# EAGLE board lights_node (EAGLE 6.5.0)
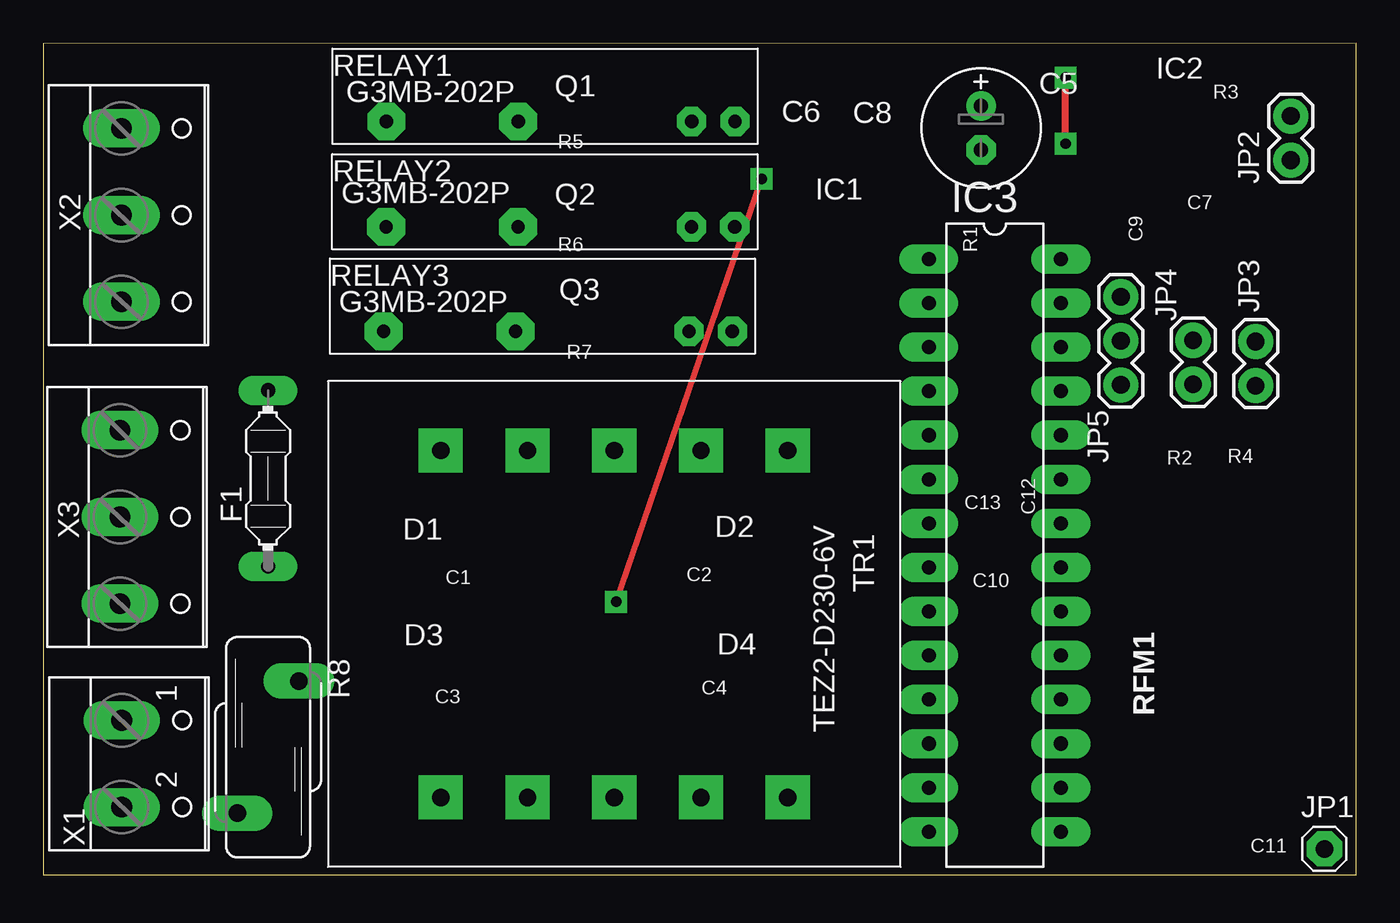
[diagram p0: board, top side]
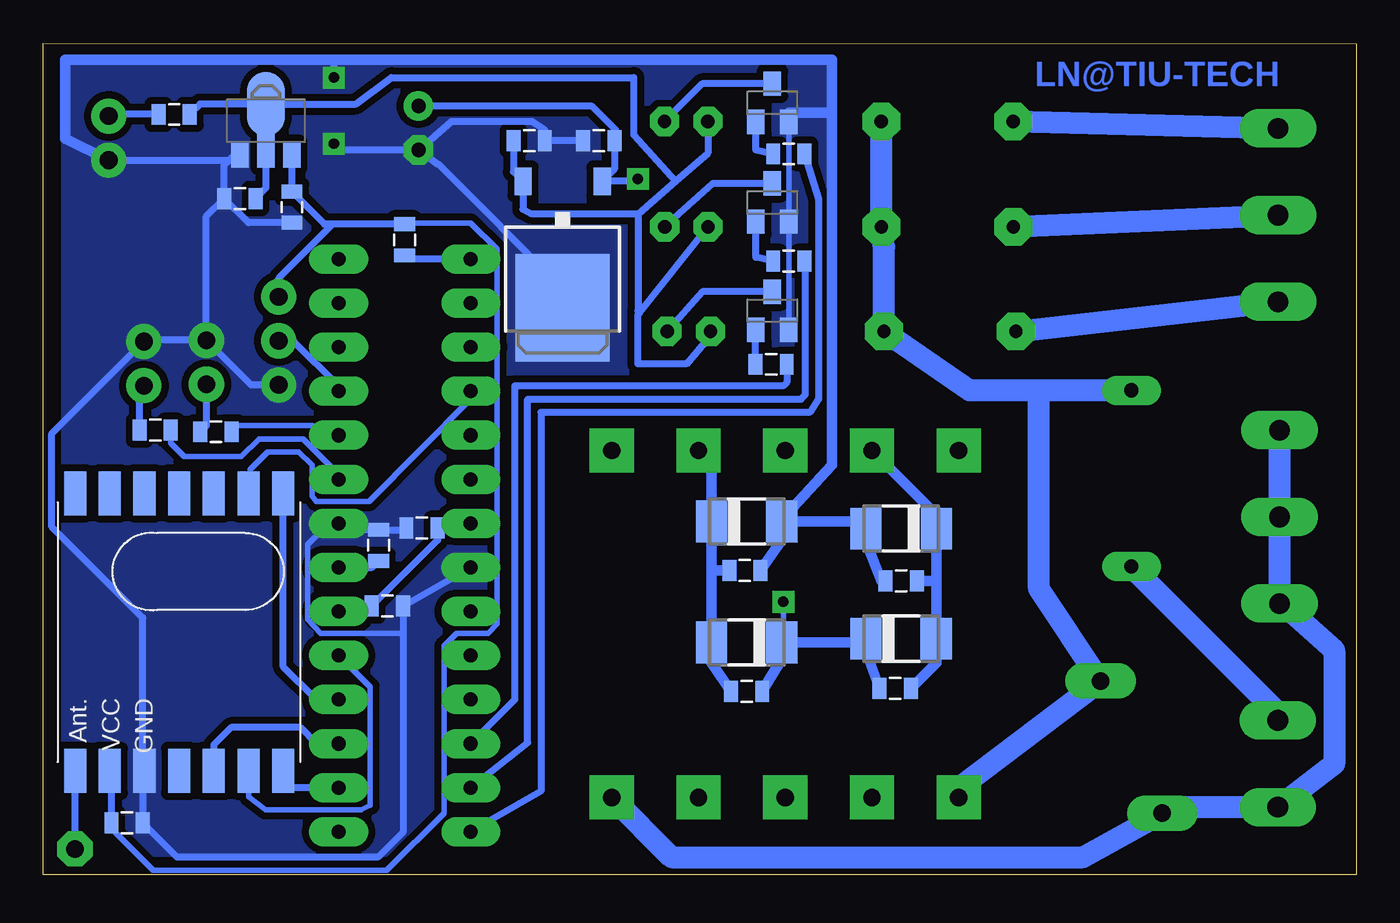
[diagram p1: board, bottom side, seen from below]

Size 75.68 x 47.95 mm. Coordinates in mm from the lower left corner, seen from the top.
Outline: 0,0 75.68,0.02 75.68,47.95 0,47.92 0,0
Copper layers (1*16): Top 0.035mm / dielectric 1.5mm / Bottom 0.035mm
Design rules "default *": minimum track width 10mil, minimum drill 24mil, track to track 8mil, track to pad 8mil, pad to pad 8mil, via to via 8mil, smd to smd 8mil, copper to edge 40mil, drill to drill 8mil, minimum pad ring 10mil, minimum via ring 8mil, stop-mask expansion 4mil, vias tented up to drill 0mil, thermal gap 10mil

## Footprints (pad centres in the part's own frame; a part is rotated, then mirrored left to right if it is on the bottom)
0805 = smd 0.8 x 1.2: 1 -0.9,0; 2 0.9,0
E2,5-7 = drill 0.813 pad 1.6: + -1.27,0 | drill 0.813 pad 1.6 octagon: - 1.27,0
DO-214AC = smd 1.8 x 2.4: A 2.025,0; C -2.025,0
PICOFUSE = drill 0.813 long: 1 -5.08,0; 2 5.08,0
TO252 = smd 1 x 1.6: 1 -2.28,-4.8; 2 2.28,-4.8 | smd 5.4 x 6.2: 3 0,2.5
MCP1703-SOT89 = smd 1 x 1.5: GND -1.499,-1.981; VOUT 1.499,-1.981 | smd 2.2 x 3.7: VIN1 0,0.94 | smd 1 x 2: VIN2 0,-1.727
DIL28-3 = drill 0.813 long: 1 -16.51,-3.81; 2 -13.97,-3.81; 3 -11.43,-3.81; 4 -8.89,-3.81; 5 -6.35,-3.81; 6 -3.81,-3.81; 7 -1.27,-3.81; 8 1.27,-3.81; 9 3.81,-3.81; 10 6.35,-3.81; 11 8.89,-3.81; 12 11.43,-3.81; 13 13.97,-3.81; 14 16.51,-3.81; 15 16.51,3.81; 16 13.97,3.81; 17 11.43,3.81; 18 8.89,3.81; 19 6.35,3.81; 20 3.81,3.81; 21 1.27,3.81; 22 -1.27,3.81; 23 -3.81,3.81; 24 -6.35,3.81; 25 -8.89,3.81; 26 -11.43,3.81; 27 -13.97,3.81; 28 -16.51,3.81
1X01 = drill 1.016 octagon: 1 0,0
1X02 = drill 1.016 pad 1.88: 1 0,0; 2 2.54,0
1X03 = drill 1.016 pad 1.88: 1 0,0; 2 2.54,0; 3 5.08,0
SOT23-BEC = smd 1 x 1.4: B -0.95,-1.1; C 0,1.1; E 0.95,-1.1
S10K300 = drill 1.016 long: 1 -1.778,-3.81; 2 1.778,3.81
G3MB-202P = drill 0.762 pad 1.676 octagon: IN+ -7.63,1.66; IN- -10.13,1.66 | drill 0.762 pad 2.184 octagon: K1 2.37,1.66; K2 9.97,1.66
RFM12B = smd 2.54 x 1.27: ANT 8,-6; FFS -8,2; GND 8,-2; IRQ -8,4; P$8 -8,0; P$9 -8,-2; P$10 -8,-4; P$12 -8,-6; P$16 8,0; SCK 8,4; SDI 8,2; SDO -8,6; SEL 8,6; VDD 8,-4
TEZ1.5-PKG = drill 1 pad 2.54 square: P1 -10.5,10; P2 -5.5,10; P3 -0.5,10; P4 4.5,10; P5 9.5,10; S6 9.5,-10; S7 4.5,-10; S8 -0.5,-10; S9 -5.5,-10; S10 -10.5,-10
W237-102 = drill 1.194 long: 1 -2.5,-1.27; 2 2.5,-1.27
W237-103 = drill 1.194 long: 1 -5,-1.29; 2 0,-1.29; 3 5,-1.29

## Placement (x,y rotation side)
C1  0.1u/63V  [0805]  26.23,16.95 0 bottom
C2  0.1u/63V  [0805]  35.24,17.55 180 bottom
C3  0.1u/63V  [0805]  26.58,10.76 180 bottom
C4  0.1u/63V  [0805]  35.14,10.58 0 bottom
C5  470u/16V  [E2,5-7]  54.05,43.07 270 top
C6  1u  [0805]  43.66,42.34 180 bottom
C7  1u  [0805]  64.35,39 180 bottom
C8  1u  [0805]  47.67,42.34 0 bottom
C9  1u  [0805]  61.35,38.5 270 bottom
C10  0.1u  [0805]  55.85,15.5 0 bottom
C11  1u  [0805]  70.85,3 0 bottom
C12  0.1u  [0805]  56.35,19 90 bottom
C13  0.1u  [0805]  53.85,20 0 bottom
D1  M7  [DO-214AC]  26.23,19.97 180 bottom
D2  M7  [DO-214AC]  35.14,20.37 0 bottom
D3  M7  [DO-214AC]  26.23,13.62 0 bottom
D4  M7  [DO-214AC]  35.14,13.41 180 bottom
F1  240Vac/3.15A  [PICOFUSE]  12.95,22.86 90 top
IC1  7805DT  [TO252]  45.74,35.19 180 bottom
IC2  MCP1703-3V3  [MCP1703-SOT89]  62.85,43.5 0 bottom
IC3  ATMEGA48/88/168-PU  [DIL28-3]  54.85,19 270 top
JP1  ANT  [1X01]  73.85,1.5 0 top
JP2  M02PTH  [1X02]  71.91,41.21 90 top
JP3  M02PTH  [1X02]  69.89,28.21 90 top
JP4  M02PTH  [1X02]  66.28,30.83 270 top
JP5  IR SENSOR  [1X03]  62.11,33.33 270 top
Q1  BC846  [SOT23-BEC]  33.65,44.52 0 bottom
Q2  BC846  [SOT23-BEC]  33.65,38.77 0 bottom
Q3  BC846  [SOT23-BEC]  33.65,32.52 0 bottom
R1  10K  [0805]  54.86,36.62 270 bottom
R2  270  [0805]  65.73,25.55 180 bottom
R3  470  [0805]  68.14,43.85 180 bottom
R4  270  [0805]  69.23,25.64 180 bottom
R5  36K  [0805]  32.71,41.57 0 bottom
R6  36K  [0805]  32.71,35.38 0 bottom
R7  36K  [0805]  33.72,29.44 0 bottom
R8  S10K300  [S10K300]  12.95,7.37 180 top
RELAY1  G3MB-202P  [G3MB-202P]  29.74,45.11 180 top
RELAY2  G3MB-202P  [G3MB-202P]  29.73,39.03 180 top
RELAY3  G3MB-202P  [G3MB-202P]  29.59,33 180 top
RFM1  RFM12B  [RFM12B]  67.85,14 270 bottom
TR1  TEZ2-D230-6V  [TEZ1.5-PKG]  32.41,14.47 180 top
X1  230Vac  [W237-102]  5.79,6.41 270 top
X2  L-H  [W237-103]  5.79,38.05 270 top
X3  L-N  [W237-103]  5.71,20.64 270 top

## Library data of the parts
C1-C4 C6-C13 R1-R4 = SparkFun-Passives
C5 = resistor
D1-D4 = diode
F1 = fuse; OC_FARNELL: unknown; OC_NEWARK: unknown
IC1 = linear
IC2 = MCP1703_SOT89
IC3 = atmega48_88_168
JP1 = pinhead
JP2-JP5 = SparkFun-Connectors
Q1-Q3 = transistor
R5-R7 = SparkFun-Resistors
R8 = varistor
RELAY1-RELAY3 = g3mb
RFM1 = JeeParts
TR1 = breve-tufvassons-transf
X1 = con-wago-500; MPN: 237-102; OC_FARNELL: unknown; OC_NEWARK: 70K9898
X2 X3 = con-wago-500; MPN: 237-103; OC_FARNELL: unknown; OC_NEWARK: 18M7116

## Nets
+3V3: C9.1 C10.1 C11.1 C13.2 IC2.VOUT IC3.7 IC3.20 JP5.1 R1.1 RFM1.VDD
+5V: C7.1 C8.1 IC1.2 IC2.VIN1 IC2.VIN2 R3.1 RELAY1.IN+ RELAY2.IN+ RELAY3.IN+
AGND: R8.2 TR1.P1 X1.2 X3.1 X3.2 X3.3
GND: C1.1 C2.1 C5.- C6.2 C7.2 C8.2 C9.2 C10.2 C11.2 C12.2 C13.1 D1.A D2.A IC1.3 IC2.GND IC3.8 IC3.22 JP2.1 JP3.2 JP4.1 JP5.3 Q1.E Q2.E Q3.E RFM1.GND
IR_DATA: IC3.25 JP5.2
IR_LED: IC3.24 R2.1
IRQ: IC3.4 RFM1.IRQ
MISO: IC3.18 RFM1.SDO
MOSI: IC3.17 RFM1.SDI
N$1: F1.2 R8.1 RELAY1.K1 RELAY2.K1 RELAY3.K1 TR1.P5
N$2: RELAY1.K2 X2.1
N$3: RELAY2.K2 X2.2
N$4: RELAY3.K2 X2.3
N$5: Q1.C RELAY1.IN-
N$6: Q1.B R5.1
N$7: Q2.C RELAY2.IN-
N$8: JP2.2 R3.2
N$9: JP4.2 R2.2
N$10: C1.2 C3.1 D1.C D3.A TR1.S7
N$11: C2.2 C4.1 D2.C D4.A TR1.S9
N$12: JP3.1 R4.2
N$13: Q2.B R6.1
N$14: Q3.B R7.1
N$15: C12.1 IC3.21
N$16: JP1.1 RFM1.ANT
N$17: Q3.C RELAY3.IN-
N$18: F1.1 X1.1
RELAY1_CMD: IC3.14 R5.2
RELAY2_CMD: IC3.13 R6.2
RELAY3_CMD: IC3.12 R7.2
RESET: IC3.1 R1.2
RF_LED: IC3.23 R4.1
SCK: IC3.19 RFM1.SCK
SS: IC3.16 RFM1.SEL
VRAW: C3.2 C4.2 C5.+ C6.1 D3.C D4.C IC1.1

## Tracks (layer width: path | path; a pad name or v marks a point on that pad's centre or on a via)
+3V3
  Bottom 0.305: 49.53,20.26 49.53,36.07 51.05,37.59 54.79,37.59 R1.1 | 49.53,20.26 IC3.7 | C11.1 71.75,2.66 69.34,0.25 55.88,0.25 52.58,3.56 52.58,13.21 51.87,13.92 50.04,13.92 49.53,14.48 49.53,20.26
  Bottom 0.406: IC3.20 58.35,15.5 C10.1 52.95,19.3 C13.2 52.68,20.27 IC3.7 50.85,20.27 | C11.1 71.75,5.9 RFM1.VDD | C9.1 IC2.VOUT | 61.32,39.37 C9.1 | JP5.1 62.11,34.41 59,37.52 | R1.1 59,37.52 | 59,37.52 59.47,37.52 C9.1
+5V
  Bottom 0.406: C8.1 48.57,40.54 IC1.2 48.02,38.37 47.5,38.1 41.4,38.1 | IC2.VIN1 57.67,44.44 55.63,45.97 41.66,45.97 41.66,42.67 39.23,40 | IC2.VIN1 IC2.VIN2 62.85,39.6 C7.1 | IC2.VIN1 66.64,44.44 R3.1 | 41.3,32.41 41.4,32.31 41.4,29.46 38.61,29.46 37.22,31.11 RELAY3.IN+ | 41.3,32.41 RELAY2.IN+ | RELAY1.IN+ 37.37,41.62 39.23,40 | 41.4,38.1 41.4,32.51 41.3,32.41 | 39.23,40 41.4,38.1
AGND
  Bottom 1.27: X3.1 X3.2 X3.3 3.7,15.13 1.27,12.95 1.27,6.4 X1.2 10.77,3.91 R8.2 15.75,1.02 39.46,1.02 TR1.P1
GND  (via drill 0.6)
  Top 0.406: v58.93,42.16 v58.93,45.97
  Bottom 0.305: IC3.22 59.23,20.27 60.45,19.05 60.45,14.73 59.69,13.92 54.95,13.92 | Q3.E Q2.E Q1.E
  Bottom 0.406: IC3.22 58.29,19.9 C12.2 54.85,19.9 C13.1 54.95,19.8 | 69.95,5.9 RFM1.GND | JP5.3 63.7,28.25 JP4.1 | JP4.1 69.81,30.83 JP3.2 75.18,25.46 75.18,20.07 69.95,14.83 69.95,5.9 | C6.2 C8.2 46.77,42.96 47.5,43.43 52.16,43.43 C5.- | C7.2 65.28,39.03 65.28,40.89 64.65,41.52 IC2.GND 64.66,41.21 JP2.1 | C1.1 27.37,16.95 | 69.95,5.9 C11.2 67.97,1.02 56.39,1.02 54.95,2.45 54.95,13.92 C10.2 IC3.8 | D2.A 33.12,20.48 | C9.2 63.85,37.6 C7.2 | JP4.1 66.28,37.97 C7.2 | IC1.3 45.72,32.72 45.72,33.78 52.94,41 53,41 C5.- | C5.- 58.82,41.8 v58.93,42.16 | v58.93,45.97 58.93,46.99
  Bottom 0.61: 27.37,16.95 28.19,19.05 28.19,19.91 | C2.1 33.12,19.28 D2.A 28.66,20.38 | JP2.1 74.42,42.45 74.42,46.99 58.93,46.99 30.23,46.99 30.23,43.94 | 33.12,20.48 30.23,23.62 30.23,43.94 | Q1.E 32.68,43.94 30.23,43.94
  Bottom 0.813: 28.19,19.91 D1.A 28.66,20.38
  pour Bottom (isolate 0.406, no thermals): 46.99,0 75.69,0 75.69,47.75 46.99,47.75
  pour Bottom (isolate 0.406, no thermals): 30.23,47.75 30.23,27.94 75.69,27.69 75.95,47.5
IR_DATA
  Bottom 0.406: IC3.25 58.66,28.18 61.21,30.73 62.06,30.73 JP5.2
IR_LED
  Bottom 0.305: IC3.24 58.88,25.35 60.2,25.91 64.72,25.91 R2.1
IRQ
  Bottom 0.305: IC3.4 51.04,27.45 56.9,21.54 59.94,21.54 60.2,21.84 60.2,23.62 60.96,24.38 62.74,24.38 63.75,23.37 63.75,22.1
  Bottom 0.406: 63.75,22.1 RFM1.IRQ
MISO
  Bottom 0.406: IC3.18 59.96,10.11 61.85,12 RFM1.SDO
MOSI
  Bottom 0.406: IC3.17 59.92,7.57 60.85,8.5 64.85,8.5 65.85,7.5 RFM1.SDI
N$1
  Bottom 1.27: RELAY1.K1 27.36,42.67 RELAY2.K1 27.22,36.21 RELAY3.K1 22.29,27.94 18.54,27.94 | TR1.P5 22.91,5.03 R8.1 18.29,16.51 18.29,27.69 18.54,27.94 | F1.2 18.54,27.94
N$2
  Bottom 1.27: RELAY1.K2 X2.1
N$3
  Bottom 1.27: RELAY2.K2 X2.2
N$4
  Bottom 1.27: RELAY3.K2 X2.3
N$5
  Bottom 0.406: RELAY1.IN- 37.7,45.62 Q1.C
N$6
  Bottom 0.406: R5.1 34.6,41.8 Q1.B
N$7
  Bottom 0.406: Q2.C 37.1,39.87 RELAY2.IN-
N$8
  Bottom 0.406: R3.2 71.81,43.85 JP2.2
N$9
  Bottom 0.406: JP4.2 66.28,25.9 R2.2
N$10
  Bottom 0.61: C3.1 24.21,12.23 D3.A 24.21,17.02 | 24.2,20.76 TR1.S7 | 24.21,17.02 D1.C | C1.2 24.27,16.95 24.21,17.02
  Bottom 0.813: D1.C 24.2,20.76
N$11
  Bottom 0.406: 37.34,20.2 D2.C
  Bottom 0.61: C4.1 37.16,12.22 D4.A 37.16,17.53 | TR1.S9 37.16,23.72 D2.C 37.16,17.53 | C2.2 37.14,17.55 37.16,17.53
N$12
  Bottom 0.406: R4.2 70.13,27.97 JP3.1
N$13
  Bottom 0.406: R6.1 34.6,35.62 Q2.B
N$14
  Bottom 0.406: R7.1 34.62,31.4 Q3.B
N$15
  Bottom 0.406: IC3.21 56.72,17.73 C12.1
N$16
  Bottom 0.406: JP1.1 RFM1.ANT
N$17
  Bottom 0.406: Q3.C 37.69,33.62 RELAY3.IN-
N$18
  Bottom 1.27: X1.1 4.27,9.09 F1.1
RELAY1_CMD
  Bottom 0.406: R5.2 30.99,38.97 30.99,27.43 31.5,26.67 46.99,26.67 46.99,4.83 IC3.14
RELAY2_CMD
  Bottom 0.305: 31.75,35.07 R6.2
  Bottom 0.406: 31.75,35.07 31.75,27.69 32,27.43 47.75,27.43 47.75,7.62 IC3.13
RELAY3_CMD
  Bottom 0.406: R7.2 32.82,28.39 33.02,28.19 48.51,28.19 48.51,10.1 IC3.12
RESET
  Bottom 0.406: IC3.1 54.65,35.51 R1.2
RF_LED
  Bottom 0.305: IC3.23 58.66,23.1 60.71,25.15 63.25,25.15 64.26,24.13 67.56,24.13 68.33,24.89 R4.1
  Bottom 0.406: R4.1
SCK
  Bottom 0.305: RFM1.SCK 63.85,4.5 62.85,3.75 57.35,3.75 56.85,4 56.85,10.84 IC3.19
SS
  Bottom 0.406: IC3.16 61.85,5.03 RFM1.SEL
VRAW  (via drill 0.6)
  Top 0.305: v41.4,40.13 v33.02,15.75
  Bottom 0.305: D4.C 33.02,13.5 v33.02,15.75
  Bottom 0.406: C5.+ 44.08,44.34 42.67,42.93 42.67,42.42 C6.1 42.76,40.7 IC1.1 41.54,39.99 v41.4,40.13 | 28.47,13.41 D3.C
  Bottom 0.61: C4.2 33.22,12.28 D4.C 28.47,13.41 | C3.2 28.24,12.84 D3.C

## Text on the board
Bottom: LN@TIU-TECH